# Altium PCB cSLIM-shield.PcbDoc (part 1 of 2)
Units mm, origin at the board's own origin, x right, y up, seen from the top; angles counter-clockwise.
Board outline 102.87 x 55.88 mm, 2 copper layers (F.Cu, B.Cu); 128 components, 156 nets, 529 pads, 123 vias.
Unrouted connection lines stored in the file: 8.
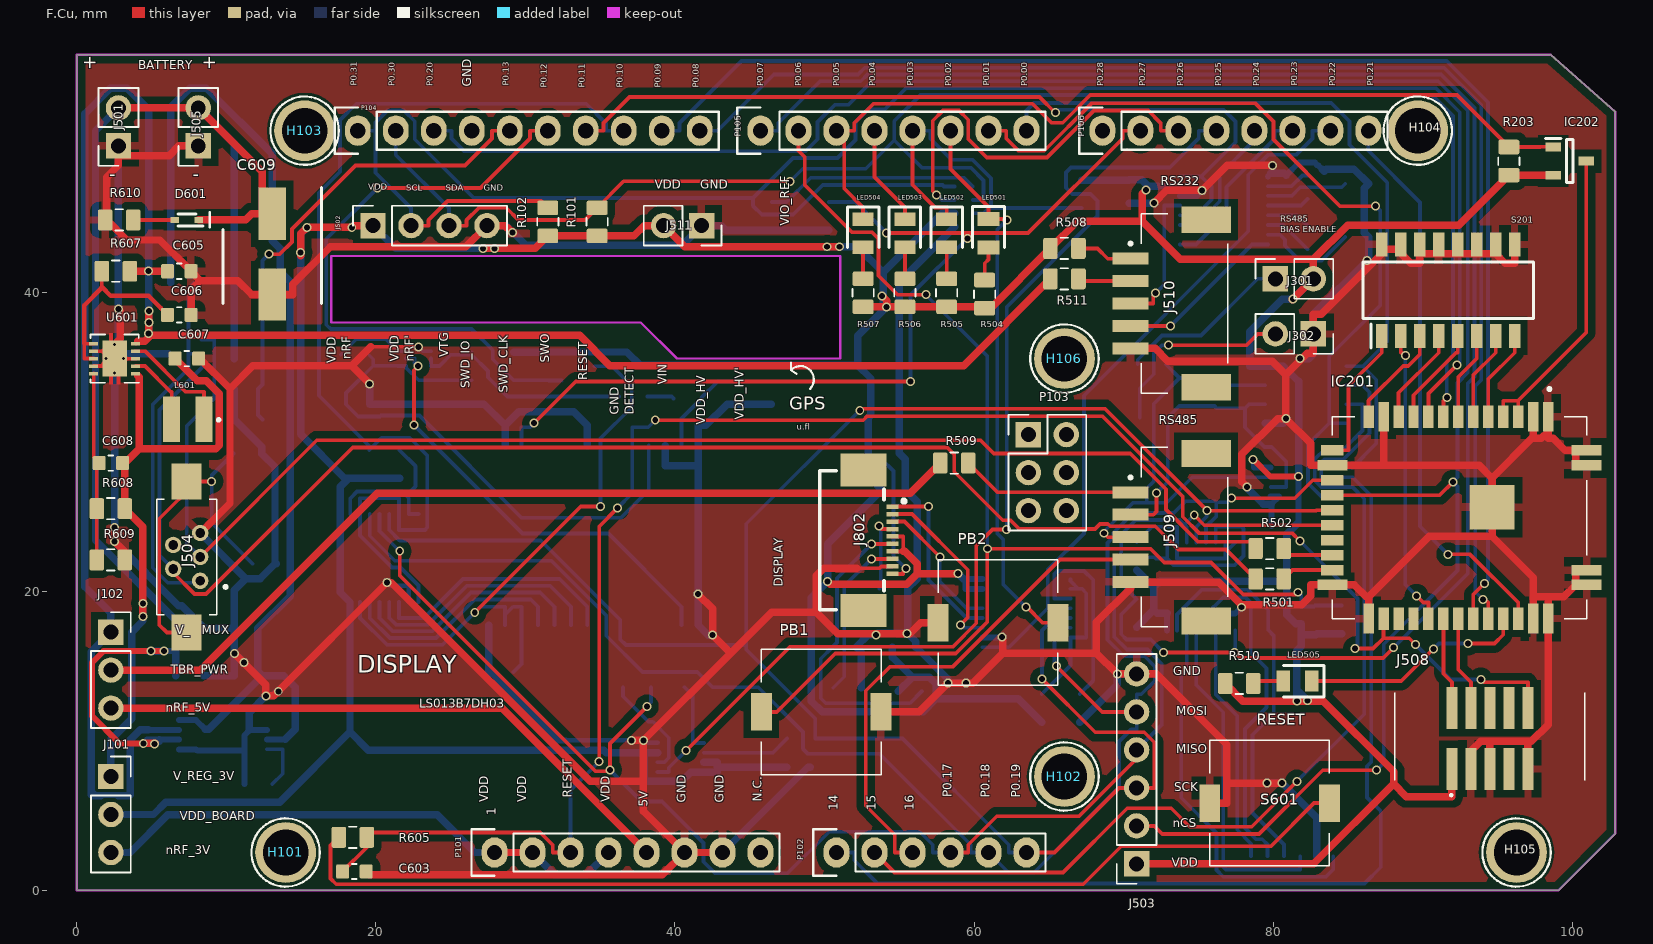
[diagram p0: F.Cu view]
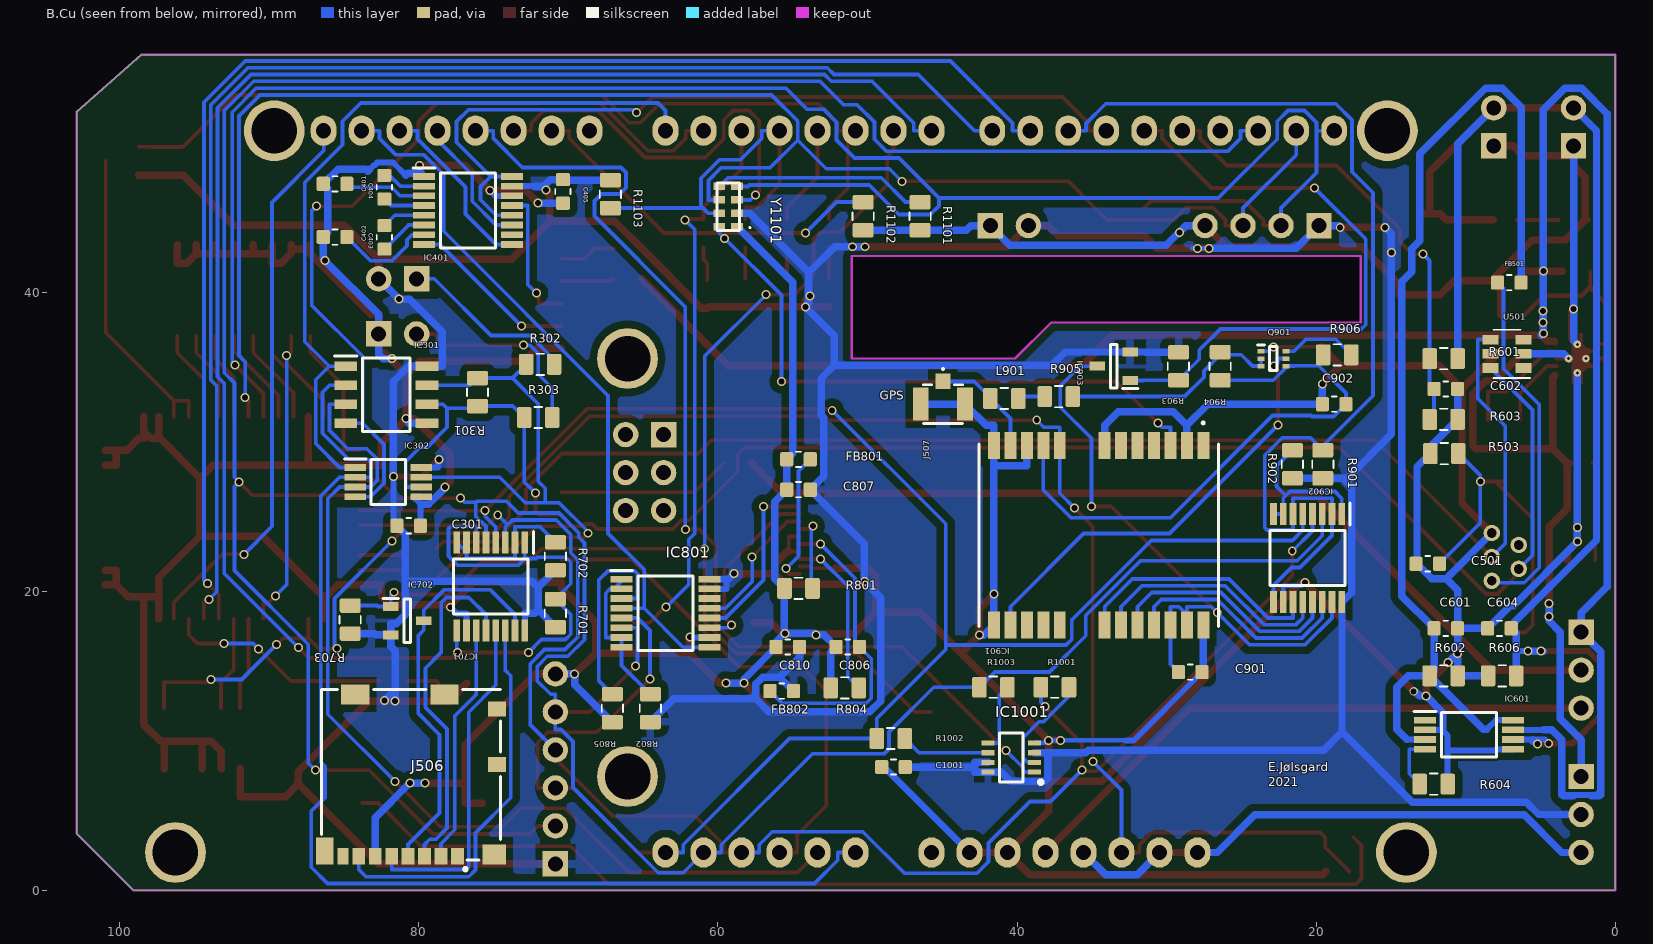
[diagram p1: B.Cu view, seen from below]

## Layer stack, top to bottom
F.Mask: solder mask 0.0102, Solder Resist, Dk 3.5
F.Cu: signal copper 0.0356
Dielectric 1: dielectric 0.32, FR-4, Dk 4.8
B.Cu: signal copper 0.0356
B.Mask: solder mask 0.0102, Solder Resist, Dk 3.5

## Board outline
64.516,55.88 98.552,55.88 102.87,52.07 102.87,40.64 102.87,3.81 99.06,0 66.04,0 0,0 0,55.88 64.516,55.88
cut-out: 51.054,42.418 51.054,38.862 51.054,35.56 43.053,35.56 40.132,35.56 37.719,37.973 35.941,37.973 17.018,37.973 17.018,38.227 17.018,38.862 17.018,42.418 51.054,42.418

## Design rules (kind name [scope] priority, off if disabled: settings)
Clearance "Clearence 0,504_Polygon" [InNamedPolygon('F.Cu-GND') OR InNamedPolygon('B.Cu-VDD')] p1: gap=0.504 ignorepadtopadclearanceinfootprint=FALSE
Clearance "Clearence 0,2_NetClass" [InNetClass('Default') OR InNetClass('GND') OR InNetClass('PWR')] p2: gap=0.2 ignorepadtopadclearanceinfootprint=FALSE
HoleSize "Hole Size (Default)" [All] p1: absolutevalues=TRUE maxlimit=10 minlimit=0.3 maxpercent=80.000 minpercent=20.000
MinimumSolderMaskSliver [All] p1: minsoldermaskwidth=0
PolygonConnect Polygon_B.Cu-VDD_ConnectDirect [IsNamedPolygon('B.Cu-VDD') vs IsVia] p1: connectstyle=Direct reliefconductorwidth=0.254 reliefentries=4 polygonreliefangle="90 Angle" airgapwidth=0.254
PolygonConnect Polygon_B.Cu-VDD_ConnectRelief45 [IsNamedPolygon('B.Cu-VDD') vs (IsThruPin or IsSMTPin) and (PadShape_AllLayers = 'Round')] p2: connectstyle=Relief reliefconductorwidth=0.508 reliefentries=4 polygonreliefangle="45 Angle" airgapwidth=0.508
PolygonConnect Polygon_B.Cu-VDD_ConnectRelief90 [IsNamedPolygon('B.Cu-VDD') vs (IsThruPin or IsSMTPin) and (PadShape_AllLayers <> 'Round')] p3: connectstyle=Relief reliefconductorwidth=0.508 reliefentries=4 polygonreliefangle="90 Angle" airgapwidth=0.508
PolygonConnect Polygon_F.Cu-GND_ConnectDirect [IsNamedPolygon('F.Cu-GND') vs IsVia] p4: connectstyle=Direct reliefconductorwidth=0.254 reliefentries=4 polygonreliefangle="90 Angle" airgapwidth=0.254
PolygonConnect Polygon_F.Cu-GND_ConnectRelief45 [IsNamedPolygon('F.Cu-GND') vs (IsThruPin or IsSMTPin) and (PadShape_AllLayers = 'Round')] p5: connectstyle=Relief reliefconductorwidth=0.508 reliefentries=4 polygonreliefangle="45 Angle" airgapwidth=0.508
PolygonConnect Polygon_F.Cu-GND_ConnectRelief90 [IsNamedPolygon('F.Cu-GND') vs (IsThruPin or IsSMTPin) and (PadShape_AllLayers <> 'Round')] p6: connectstyle=Relief reliefconductorwidth=0.508 reliefentries=4 polygonreliefangle="90 Angle" airgapwidth=0.508
RoutingVias [All] p1: holewidth=0.711 width=1.27 viastyle="Through Hole" minholewidth=0.711 minwidth=1.27 maxholewidth=0.711 maxwidth=1.27
SilkToSilkClearance [All] p1: silktosilkclearance=0
SilkToSolderMaskClearance [IsPad] p1: minsilkscreentomaskgap=0 clearancetoexposedcopper=TRUE
SolderMaskExpansion [All] p1: expansion=0.102 istentingtop=FALSE
Width [All] p1: maxlimit=10 minlimit=0.2 preferedwidth=0.25 minimp=50.000000 maximp=50.000000 favimp=50.000000
26 further rules are at their usual default settings.

## Classes and differential pairs
net class PWR: +BATT TBR_PWR USB_VBUS V_MUX_OUT V_nRF_3V V_nRF_5V V_reg VDD
net class GND: GND
net class Default: AD1 AD2 AD3 AD4 AD5 AD6 AD7 AD8 ANT_ON C1+ C1- C2+ C2- GPS_ANTENNA GPS_EXTINT GPS_MISO GPS_MOSI GPS_nCS GPS_SCK GPS_TIMEPULSE GPS_VDD I2C_SCL I2C_SDA LoRa_nRESET LoRa_SWDCLK LoRa_SWDIO LoRa_SWO LoRa_USB_DM LoRa_USB_DP MOSI nCS Net-(C501-Pad1) Net-(C606-Pad1) Net-(C608-Pad2) Net-(C806-Pad1) Net-(C902-Pad1) Net-(D601-Pad2) Net-(FB501-Pad2) Net-(FB801-Pad1) Net-(H101-Pad1) Net-(H102-Pad1) Net-(H103-Pad1) Net-(H104-Pad1) Net-(H105-Pad1) Net-(H106-Pad1) Net-(IC201-Pad3) Net-(IC201-Pad20) Net-(IC201-Pad26) Net-(IC201-Pad27) Net-(IC401-Pad10) Net-(IC601-Pad1) Net-(IC601-Pad4) Net-(IC701-Pad2) Net-(IC801-Pad1) Net-(IC801-Pad3) Net-(IC801-Pad14) Net-(IC901-Pad1) Net-(IC901-Pad5) Net-(IC901-Pad6) Net-(IC901-Pad15) Net-(IC901-Pad16) Net-(IC901-Pad17) Net-(IC902-Pad1) Net-(IC1001-Pad2) Net-(IC1001-Pad5) Net-(IC1001-Pad6) Net-(J301-Pad1) Net-(J302-Pad2) Net-(J504-Pad4) Net-(J506-Pad1) Net-(J506-Pad8) Net-(J508-Pad7) Net-(J508-Pad8) Net-(J509-Pad1) Net-(J509-PadMP1) Net-(J509-PadMP2) Net-(J510-Pad1) Net-(J510-Pad2) Net-(J510-PadMP1) Net-(J510-PadMP2) Net-(J802-Pad4) Net-(J802-Pad8) Net-(L601-Pad1) Net-(L601-Pad2) Net-(L901-Pad2) Net-(LED501-Pad2) Net-(LED502-Pad2) Net-(LED503-Pad2) Net-(LED504-Pad2) Net-(LED505-Pad2) Net-(P101-Pad8) Net-(P103-Pad1) Net-(P103-Pad2) Net-(P103-Pad3) Net-(P103-Pad4) Net-(P103-Pad5) Net-(P103-Pad6) Net-(P104-Pad4) Net-(P106-Pad1) Net-(Q901-Pad2) Net-(Q901-Pad6) Net-(R605-Pad2) Net-(R1101-Pad1) Net-(U501-Pad1) Net-(U501-Pad3) P0.00 P0.01 P0.02 P0.03 P0.04 P0.05 P0.06 P0.07 P0.08 P0.09 P0.10 P0.11 P0.12 P0.13 P0.14 P0.15 P0.16 P0.17 P0.18 P0.19 P0.20 P0.21 P0.22 P0.23 P0.24 P0.25 P0.26 PB03 RS232_RX RS232_TX RS485_A RS485_B SCK USB_N USB_P uSD_CLK uSD_MISO uSD_MOSI uSD_nCS uSD_VDD V+ V-

## Components (designator, comment, footprint, x,y, rotation, side; value= is the part's Value field where it differs from the comment)
C301 "100nF" C_0603_1608Metric#1 80.671,24.384 r0 bottom
C401 "100nF" C_0603_1608Metric#1 85.598,47.244 r180 bottom
C402 "100nF" C_0603_1608Metric#1 85.598,43.688 r180 bottom
C403 "100nF" C_0603_1608Metric#1 82.296,43.663 r90 bottom
C404 "100nF" C_0603_1608Metric#1 82.296,47.015 r90 bottom
C405 "100nF" C_0603_1608Metric#1 70.358,46.736 r90 bottom
C501 "12pF" C_0603_1608Metric#1 12.548,21.844 r180 bottom
C601 "100nF" C_0603_1608Metric#1 11.329,17.526 r0 bottom
C602 "1uF" C_0603_1608Metric#1 11.329,33.528 r0 bottom
C603 "1uF" C_0603_1608Metric#2 18.568,1.27 r0 top
C604 "100nF" C_0603_1608Metric#1 7.747,17.526 r180 bottom
C605 "10uF" C_0603_1608Metric#2 6.858,41.402 r0 top
C606 "100nF" C_0603_1608Metric#2 6.858,38.481 r0 top
C607 "22uF" C_0603_1608Metric#2 7.366,35.56 r0 top
C608 "1.8pF" C_0603_1608Metric#2 2.286,28.575 r180 top
C609 "PCH1E101MCL4GS" CAPAE660X840N 13.081,42.545 r270 top
C806 "100nF" C_0603_1608Metric#1 51.316,16.278 r180 bottom
C807 "1uF/50V" C_0603_1608Metric#1 54.61,26.797 r180 bottom
C810 "100nF" C_0603_1608Metric#1 55.326,16.278 r180 bottom
C901 "100nF" C_0603_1608Metric#1 28.422,14.605 r0 bottom
C902 "1uF" C_0603_1608Metric#1 18.796,32.512 r180 bottom
C1001 "100nF" C_0603_1608Metric#1 48.26,8.255 r180 bottom
D601 "1SS390SMFHT2R" SODFL1608X70N 7.366,44.831 r180 top
FB501 "500mA" C_0603_1608Metric#1 7.087,40.64 r180 bottom
FB801 "Ferrite_Bead" C_0603_1608Metric#1 54.61,28.829 r180 bottom
FB802 "Ferrite_Bead" C_0603_1608Metric#1 55.726,13.328 r180 bottom
H101 "CONN_01X01" Arduino_1pin 13.97,2.54 r0 top
H102 "CONN_01X01" Arduino_1pin 66.04,7.62 r0 top
H103 "CONN_01X01" Arduino_1pin 15.24,50.8 r0 top
H104 "CONN_01X01" Arduino_1pin 89.662,50.8 r0 top
H105 "CONN_01X01" Arduino_1pin 96.266,2.54 r0 top
H106 "CONN_01X01" Arduino_1pin 66.04,35.56 r0 top
IC201 "WLR089U0-I_RM" WLR089U0IRM 92.456,25.4 r270 top
IC202 "NX2301P,215" SOT95P230X110-3N#1 99.822,48.768 r0 top
IC301 "MAX3486ESA+" SOIC127P600X175-8N 82.169,33.147 r0 bottom
IC302 "MAX3471EUA+" SOP65P490X110-8N 82.042,27.305 r0 bottom
IC401 "MAX3221CUE+" SOP65P640X110-16N 76.708,45.466 r0 bottom
IC601 "TPS2113PWR" SOP65P640X120-8N 9.779,10.414 r0 bottom
IC701 "SN74AVC4T774PWR" SOP65P640X120-16N 75.184,20.32 r90 bottom
IC702 "NX2301P,215" SOT95P230X110-3N#2 80.772,18.034 r0 bottom
IC801 "SN74AVC4T774PWR" SOP65P640X120-16N 63.5,18.542 r0 bottom
IC901 "NEO-M9N-00B" NEO-M8T 34.544,23.749 r270 bottom
IC902 "SN74AVC4T774PWR" SOP65P640X120-16N 20.574,22.225 r90 bottom
IC903 "NX2301P,215" SOT95P230X110-3N#2 33.528,35.052 r180 bottom
IC1001 "CY15B108QN-20LPXC" SON65P323X328X55-8N 40.386,8.89 r180 bottom
J101 "Conn_01x03_Male" PinSocket_1x03_P2.54mm_Vertical 2.286,7.62 r0 top
J102 "Conn_01x03_Male" PinSocket_1x03_P2.54mm_Vertical 2.286,17.272 r0 top
J301 "Conn_01x02_Male" PinSocket_1x02_P2.54mm_Vertical 80.137,40.894 r90 top
J302 "Conn_01x02_Male" PinSocket_1x02_P2.54mm_Vertical 82.677,37.211 r270 top
J501 "Conn_01x02_Male" PinSocket_1x02_P2.54mm_Vertical 2.794,49.784 r180 top
J502 "Conn_01x04" PinSocket_1x04_P2.54mm_Vertical 19.812,44.45 r90 top
J503 "Conn_01x06" PinSocket_1x06_P2.54mm_Vertical 70.866,1.778 r180 top
J504 "10119313-302TLF" 10119313302TLF 8.255,20.701 r90 top
J505 "Conn_01x02_Male" PinSocket_1x02_P2.54mm_Vertical 8.128,49.784 r180 top
J506 "104031-0811" 1040310811 80.518,2.032 r0 bottom
J507 "CONUFL001-SMD-T" CONUFL001-SMD 44.958,32.512 r180 bottom
J508 "SHF-105-01-L-D-SM" SHF-105-01-X-D-SM 94.488,10.16 r0 top
J509 "BM05B-ZESS-TBT__LF__SN_" BM05BZESSTBTLFSN 73.66,23.622 r90 top
J510 "BM05B-ZESS-TBT__LF__SN_" BM05BZESSTBTLFSN 73.66,39.243 r90 top
J511 "Conn_01x02_Male" PinSocket_1x02_P2.54mm_Vertical 41.783,44.45 r270 top
J802 "52746-1071" 52746-1071 53.975,28.067 r270 top
L601 "LPS3015-222MRB" LPS3015 7.43,31.496 r180 top
L901 "L" L_0805_2012Metric 40.846,32.893 r0 bottom
LED501 "APT2012LSECK_J3-PRV" LEDC2012X75N 60.96,43.942 r270 top
LED502 "APT2012LSYCK_J3-PRV" LEDC2012X85N 58.166,43.942 r270 top
LED503 "APT2012LZGCK" LEDC2012X85N 55.372,43.942 r270 top
LED504 "APT2012LVBC_D" LEDC2012X85N 52.578,43.942 r270 top
LED505 "APT2012LVBC_D" LEDC2012X85N 81.629,14 r180 top
P101 "Power" Socket_Strip_Arduino_1x08 27.94,2.54 r0 top
P102 "Analog" Socket_Strip_Arduino_1x06 50.8,2.54 r0 top
P103 "Conn_02x03_Odd_Even" PinHeader_2x03_P2.54mm_Vertical 63.627,30.48 r0 top
P104 "Digital" Socket_Strip_Arduino_1x10 18.796,50.8 r0 top
P105 "Digital" Socket_Strip_Arduino_1x08 45.72,50.8 r0 top
P106 "Digital" Socket_Strip_Arduino_1x08 68.58,50.8 r0 top
PB1 "TLS_A_070J_LFS" TLSA070JLFS 49.784,11.938 r0 top
PB2 "TLS_A_070J_LFS" TLSA070JLFS 61.595,17.907 r180 top
Q901 "SI1040X-T1-GE3" SOTFL50P160X60-6N 22.86,35.56 r0 bottom
R101 "4.7k" R_0805_2012Metric#1 34.798,44.704 r270 top
R102 "4.7k" R_0805_2012Metric#1 31.496,44.704 r270 top
R203 "100k" R_0805_2012Metric#1 95.758,48.768 r270 top
R301 "120R" R_0805_2012Metric#2 76.073,33.322 r90 bottom
R302 "680R" R_0805_2012Metric#2 71.882,35.179 r180 bottom
R303 "680R" R_0805_2012Metric#2 72.009,31.623 r0 bottom
R501 "15R" R_0805_2012Metric#1 79.756,20.828 r0 top
R502 "15R" R_0805_2012Metric#1 79.756,22.86 r0 top
R503 "0R" R_0805_2012Metric#2 11.43,29.21 r180 bottom
R504 "820R" R_0805_2012Metric#1 60.706,39.878 r270 top
R505 "820R" R_0805_2012Metric#1 58.166,39.957 r270 top
R506 "330R" R_0805_2012Metric#1 55.372,39.957 r270 top
R507 "330R" R_0805_2012Metric#1 52.578,39.957 r270 top
R508 "0R" R_0805_2012Metric#1 66.04,42.926 r180 top
R509 "0R" R_0805_2012Metric#1 58.674,28.575 r180 top
R510 "330R" R_0805_2012Metric#1 77.724,13.843 r180 top
R511 "0R" R_0805_2012Metric#1 66.04,40.894 r180 top
R601 "240k" R_0805_2012Metric#2 11.479,35.56 r0 bottom
R602 "1M" R_0805_2012Metric#2 11.479,14.351 r0 bottom
R603 "100k" R_0805_2012Metric#2 11.479,31.496 r0 bottom
R604 "390R" R_0805_2012Metric#2 12.143,7.112 r0 bottom
R605 "1k" R_0805_2012Metric#1 18.464,3.556 r180 top
R606 "1M" R_0805_2012Metric#2 7.571,14.351 r180 bottom
R607 "100R" R_0805_2012Metric#1 2.618,41.402 r0 top
R608 "1M2" R_0805_2012Metric#1 2.286,25.527 r180 top
R609 "240k" R_0805_2012Metric#1 2.286,22.098 r0 top
R610 "3k" R_0805_2012Metric#1 2.842,44.831 r180 top
R701 "100k" R_0805_2012Metric#2 70.866,18.542 r90 bottom
R702 "100k" R_0805_2012Metric#2 70.866,22.352 r90 bottom
R703 "100k" R_0805_2012Metric#2 84.582,18.113 r90 bottom
R801 "100k" R_0805_2012Metric#2 54.61,20.193 r180 bottom
R802 "100k" R_0805_2012Metric#2 64.516,12.192 r90 bottom
R804 "100k" R_0805_2012Metric#2 51.516,13.548 r180 bottom
R805 "100k" R_0805_2012Metric#2 67.056,12.192 r90 bottom
R901 "100k" R_0805_2012Metric#2 19.558,28.496 r90 bottom
R902 "100k" R_0805_2012Metric#2 21.59,28.496 r90 bottom
R903 "100k" R_0805_2012Metric#2 29.21,35.052 r270 bottom
R904 "0R" R_0805_2012Metric#2 26.416,35.052 r90 bottom
R905 "10R" R_0805_2012Metric#2 37.211,33.02 r180 bottom
R906 "100k" R_0805_2012Metric#2 18.591,35.814 r180 bottom
R1001 "33R" R_0805_2012Metric#2 37.465,13.589 r0 bottom
R1002 "33R" R_0805_2012Metric#2 48.436,10.16 r0 bottom
R1003 "50R" R_0805_2012Metric#2 41.578,13.589 r0 bottom
R1101 "10k" R_0805_2012Metric#2 46.482,45.085 r90 bottom
R1102 "100k" R_0805_2012Metric#2 50.292,45.085 r270 bottom
R1103 "100k" R_0805_2012Metric#2 67.183,46.561 r270 bottom
S201 "97C08ST" SOIC127P671X170-16N 91.694,40.132 r90 top
S601 "TLS_A_070J_LFS" TLSA070JLFS 79.756,5.842 r180 top
U501 "USBLC6-2SC6" SOT-23-6 7.239,35.88 r180 bottom
U601 "TPS63000" Texas_DRC0010J_ThermalVias 2.54,35.56 r180 top
Y1101 "RV-3032-C7-TA-QC" RV3032C7TAQA 59.309,45.72 r90 bottom

## Footprints (in the part's own frame and the unit in brackets; to place one, negate y for a bottom-side part, rotate by r counter-clockwise, add the part's x,y. Pads: shape width x height; smd on the part's side, far side on the other; paste and mask are expansions set on the pad)
52746-1071 [mm]
  rect 0.3x0.8 smd mask+0: 1(2.4,0.556) 2(2.9,0.556) 3(3.4,0.556) 4(3.9,0.556) 5(4.4,0.556) 6(4.9,0.556) 7(5.4,0.556) 8(5.9,0.556) 9(6.4,0.556) 10(6.9,0.556)
  rect 2.2x3.05 smd mask+0: 11(-0.05,-1.369) 12(9.35,-1.369)
  silkscreen extent 0,-4.3 9.3,1.44
1040310811 [mm]
  rect 0.85x1.1 smd mask+0: 1(-3.105,-0.25) 2(-2.005,-0.25) 3(-0.905,-0.25) 4(0.195,-0.25) 5(1.295,-0.25) 6(2.395,-0.25) 7(3.495,-0.25)
  rect 0.75x1.1 smd mask+0: 8(4.545,-0.25)
  rect 1.17x1.8 smd mask+0: 9(5.755,-0.6)
  rect 1.9x1.35 smd mask+0: 10(3.73,-11.075) 11(-2.24,-11.075)
  rect 1.2x1 smd mask+0: 12(-5.74,-10.1) 13(-5.74,-6.4)
  rect 1.55x1.35 smd mask+0: 14(-5.565,-0.375)
  silkscreen extent -5.97,-11.4 5.97,0.72
10119313302TLF [mm]
  round 1.1 hole 0.65 paste-1.1 mask+0: 1(0,0) 2(0.8,1.8) 3(1.6,0) 4(2.4,1.8) 5(3.2,0)
  rect 2.4x2 smd mask+0: MP1(-3.45,0.9) MP2(6.65,0.9)
  silkscreen extent -2.25,-1.8 5.45,2.9
Arduino_1pin [mil]
  round 160 hole 120 paste-160 mask+0: 1(0,0)
  silkscreen extent -90,-90 90,90
BM05BZESSTBTLFSN [mm]
  rect 0.8x2.4 smd mask+0: 1(3,3.2) 2(1.5,3.2) 3(0,3.2) 4(-1.5,3.2) 5(-3,3.2)
  rect 1.8x3.3 smd mask+0: MP1(5.6,-1.85) MP2(-5.6,-1.85)
  silkscreen extent -6,-3.3 6,3.3
C_0603_1608Metric#1 [mm]
  rrect25% 0.875x0.95 smd mask+0: 1(0.787,0) 2(-0.787,0)
  silkscreen extent -0.16,-0.51 0.16,0.51
C_0603_1608Metric#2 [mm]
  rrect25% 0.875x0.95 smd mask+0: 1(-0.787,0) 2(0.787,0)
  silkscreen extent -0.16,-0.51 0.16,0.51
CAPAE660X840N [mm]
  rect 3.5x1.85 smd mask+0: 1(-2.7,0) 2(2.7,0)
  silkscreen extent -4.45,-3.3 3.3,3.3
CONUFL001-SMD [mm]
  rect 1x1.05 smd mask+0: 1(0,1.525)
  rect 1.05x2.2 smd mask+0: 2(1.475,0) 3(-1.475,0)
  silkscreen extent -1.3,-1.3 1.3,2.38
L_0805_2012Metric [mm]
  rrect25% 0.975x1.4 smd mask+0: 1(0.937,0) 2(-0.937,0)
  silkscreen extent -0.26,-0.71 0.26,0.71
LEDC2012X75N [mm]
  rect 0.95x1.45 smd mask+0: 1(-0.95,0) 2(0.95,0)
  silkscreen extent -1.78,-1.07 0.95,1.07
LEDC2012X85N [mm]
  rect 0.9x1.4 smd mask+0: 1(-0.95,0) 2(0.95,0)
  silkscreen extent -1.75,-1.05 0.95,1.05
LPS3015 [mm]
  rect 1.14x3.05 smd mask+0: 1(-1.08,0) 2(1.08,0)
  silkscreen extent -2.11,-0.03 -2,0.09
NEO-M8T [mm]
  rect 1.8x0.8 smd mask+0: 1(-6,7) 2(-6,5.9) 3(-6,4.8) 4(-6,3.7) 5(-6,2.6) 6(-6,1.5) 7(-6,0.4) 8(-6,-2.6) 9(-6,-3.7) 10(-6,-4.8) 11(-6,-5.9) 12(-6,-7) 13(6,-7) 14(6,-5.9) 15(6,-4.8) 16(6,-3.7) 17(6,-2.6) 18(6,0.4) 19(6,1.5) 20(6,2.6) 21(6,3.7) 22(6,4.8) 23(6,5.9) 24(6,7)
  silkscreen extent -7.58,-8 6.1,8
PinHeader_2x03_P2.54mm_Vertical [mm]
  rect 1.7x1.7 hole 1 paste-1.7 mask+0: 1(0,0)
  rrect100% 1.7x1.7 hole 1 paste-1.7 mask+0: 2(2.54,0) 3(0,-2.54) 4(2.54,-2.54) 5(0,-5.08) 6(2.54,-5.08)
  silkscreen extent -1.33,-6.41 3.87,1.33
PinSocket_1x02_P2.54mm_Vertical [mm]
  rect 1.7x1.7 hole 1 paste-1.7 mask+0: 1(0,0)
  rrect100% 1.7x1.7 hole 1 paste-1.7 mask+0: 2(0,-2.54)
  silkscreen extent -1.33,-3.87 1.33,1.33
PinSocket_1x03_P2.54mm_Vertical [mm]
  rect 1.7x1.7 hole 1 paste-1.7 mask+0: 1(0,0)
  rrect100% 1.7x1.7 hole 1 paste-1.7 mask+0: 2(0,-2.54) 3(0,-5.08)
  silkscreen extent -1.33,-6.41 1.33,1.33
PinSocket_1x04_P2.54mm_Vertical [mm]
  rect 1.7x1.7 hole 1 paste-1.7 mask+0: 1(0,0)
  rrect100% 1.7x1.7 hole 1 paste-1.7 mask+0: 2(0,-2.54) 3(0,-5.08) 4(0,-7.62)
  silkscreen extent -1.33,-8.95 1.33,1.33
PinSocket_1x06_P2.54mm_Vertical [mm]
  rect 1.7x1.7 hole 1 paste-1.7 mask+0: 1(0,0)
  rrect100% 1.7x1.7 hole 1 paste-1.7 mask+0: 2(0,-2.54) 3(0,-5.08) 4(0,-7.62) 5(0,-10.16) 6(0,-12.7)
  silkscreen extent -1.33,-14.03 1.33,1.33
R_0805_2012Metric#1 [mm]
  rrect25% 0.975x1.4 smd mask+0: 1(-0.937,0) 2(0.937,0)
  silkscreen extent -0.26,-0.71 0.26,0.71
R_0805_2012Metric#2 [mm]
  rrect25% 0.975x1.4 smd mask+0: 1(0.937,0) 2(-0.937,0)
  silkscreen extent -0.26,-0.71 0.26,0.71
RV3032C7TAQA [mm]
  rect 0.5x0.8 smd: 1(-1.35,-0.6) 2(-0.45,-0.6) 3(0.45,-0.6) 4(1.35,-0.6) 5(1.35,0.6) 6(0.45,0.6) 7(-0.45,0.6) 8(-1.35,0.6)
  silkscreen extent -1.61,-1.5 1.59,0.75, body extent -1.6,-0.75 1.6,0.75, height 0.8
SHF-105-01-X-D-SM [mm]
  rect 0.74x2.795 smd mask+0: 1(-2.54,-2.033) 2(-2.54,2.033) 3(-1.27,-2.033) 4(-1.27,2.033) 5(0,-2.033) 6(0,2.033) 7(1.27,-2.033) 8(1.27,2.033) 9(2.54,-2.033) 10(2.54,2.033)
  silkscreen extent -6.35,-3.83 6.35,3.05
Socket_Strip_Arduino_1x06 [mil]
  rrect100% 68x80 hole 40 paste-80 mask+0: 1(0,0) 2(100,0) 3(200,0) 4(300,0) 5(400,0) 6(500,0)
  silkscreen extent -61,-61 550,61
Socket_Strip_Arduino_1x08 [mil]
  rrect100% 68x80 hole 40 paste-80 mask+0: 1(0,0) 2(100,0) 3(200,0) 4(300,0) 5(400,0) 6(500,0) 7(600,0) 8(700,0)
  silkscreen extent -61,-61 750,61
Socket_Strip_Arduino_1x10 [mil]
  rrect100% 68x80 hole 40 paste-80 mask+0: 1(0,0) 2(100,0) 3(200,0) 4(300,0) 5(400,0) 6(500,0) 7(600,0) 8(700,0) 9(800,0) 10(900,0)
  silkscreen extent -61,-61 950,61
SODFL1608X70N [mm]
  rect 0.56x0.42 smd mask+0: 1(-0.8,0) 2(0.8,0)
  silkscreen extent -1.08,-0.4 0.6,0.4
SOIC127P600X175-8N [mm]
  rect 1.525x0.65 smd mask+0: 1(2.712,-1.905) 2(2.712,-0.635) 3(2.712,0.635) 4(2.712,1.905) 5(-2.712,1.905) 6(-2.712,0.635) 7(-2.712,-0.635) 8(-2.712,-1.905)
  silkscreen extent -1.6,-2.58 3.47,2.45
SOIC127P671X170-16N [mm]
  rect 1.6x0.75 smd mask+0: 1(-3.05,4.445) 2(-3.05,3.175) 3(-3.05,1.905) 4(-3.05,0.635) 5(-3.05,-0.635) 6(-3.05,-1.905) 7(-3.05,-3.175) 8(-3.05,-4.445) 9(3.05,-4.445) 10(3.05,-3.175) 11(3.05,-1.905) 12(3.05,-0.635) 13(3.05,0.635) 14(3.05,1.905) 15(3.05,3.175) 16(3.05,4.445)
  silkscreen extent -3.85,-5.69 1.9,5.69
SON65P323X328X55-8N [mm]
  rect 0.85x0.35 smd mask+0: 1(1.55,-0.975) 2(1.55,-0.325) 3(1.55,0.325) 4(1.55,0.975) 5(-1.55,0.975) 6(-1.55,0.325) 7(-1.55,-0.325) 8(-1.55,-0.975)
  silkscreen extent -0.77,-1.77 2.1,1.64
SOP65P490X110-8N [mm]
  rect 1.425x0.45 smd mask+0: 1(2.212,-0.975) 2(2.212,-0.325) 3(2.212,0.325) 4(2.212,0.975) 5(-2.212,0.975) 6(-2.212,0.325) 7(-2.212,-0.325) 8(-2.212,-0.975)
  silkscreen extent -1.15,-1.55 2.93,1.5
SOP65P640X110-16N [mm]
  rect 1.475x0.45 smd mask+0: 1(2.938,-2.275) 2(2.938,-1.625) 3(2.938,-0.975) 4(2.938,-0.325) 5(2.938,0.325) 6(2.938,0.975) 7(2.938,1.625) 8(2.938,2.275) 9(-2.938,2.275) 10(-2.938,1.625) 11(-2.938,0.975) 12(-2.938,0.325) 13(-2.938,-0.325) 14(-2.938,-0.975) 15(-2.938,-1.625) 16(-2.938,-2.275)
  silkscreen extent -1.85,-2.85 3.67,2.5
SOP65P640X120-8N [mm]
  rect 1.475x0.45 smd mask+0: 1(2.938,-0.975) 2(2.938,-0.325) 3(2.938,0.325) 4(2.938,0.975) 5(-2.938,0.975) 6(-2.938,0.325) 7(-2.938,-0.325) 8(-2.938,-0.975)
  silkscreen extent -1.85,-1.55 3.67,1.5
SOP65P640X120-16N [mm]
  rect 1.475x0.45 smd mask+0: 1(2.938,-2.275) 2(2.938,-1.625) 3(2.938,-0.975) 4(2.938,-0.325) 5(2.938,0.325) 6(2.938,0.975) 7(2.938,1.625) 8(2.938,2.275) 9(-2.938,2.275) 10(-2.938,1.625) 11(-2.938,0.975) 12(-2.938,0.325) 13(-2.938,-0.325) 14(-2.938,-0.975) 15(-2.938,-1.625) 16(-2.938,-2.275)
  silkscreen extent -1.85,-2.85 3.67,2.5
SOT95P230X110-3N#1 [mm]
  rect 1.05x0.6 smd mask+0: 1(-1.1,0.95) 2(-1.1,-0.95) 3(1.1,0)
  silkscreen extent -1.63,-1.45 0.23,1.5
SOT95P230X110-3N#2 [mm]
  rect 1.05x0.6 smd mask+0: 1(1.1,-0.95) 2(1.1,0.95) 3(-1.1,0)
  silkscreen extent -0.23,-1.5 1.63,1.45
SOT-23-6 [mm]
  rect 1.06x0.65 smd mask+0: 1(1.1,-0.95) 2(1.1,0) 3(1.1,0.95) 4(-1.1,0.95) 5(-1.1,0) 6(-1.1,-0.95)
  silkscreen extent -0.9,-1.61 1.55,1.61
SOTFL50P160X60-6N [mm]
  rect 0.47x0.3 smd mask+0: 1(0.835,-0.5) 2(0.835,0) 3(0.835,0.5) 4(-0.835,0.5) 5(-0.835,0) 6(-0.835,-0.5)
  silkscreen extent -0.25,-0.9 1.07,0.8
Texas_DRC0010J_ThermalVias [mm]
  rect 0.6x0.24 smd mask+0: 1(-1.4,1) 2(-1.4,0.5) 3(-1.4,0) 4(-1.4,-0.5) 5(-1.4,-1) 6(1.4,-1) 7(1.4,-0.5) 8(1.4,0) 9(1.4,0.5) 10(1.4,1)
  round 0.5 hole 0.2 paste-0.5 mask-0.5: 11(-0.575,0) 11(0,0.95) 11(0,-0.95) 11(0.575,0)
  rect 1.65x2.4 smd paste-2.4 mask+0: 11(0,0)
  rrect10% 1.5x1.06 on Top Paste mask-1.5: Un1(0,-0.63) Un2(0,0.63)
  rrect10% 0.25x0.34 on Top Paste mask-0.34: Un3(-0.25,1.53) Un4(0.25,1.53) Un5(-0.25,-1.53) Un6(0.25,-1.53)
  F.Cu region: 0.375,-1.7 0.125,-1.7 0.125,-1.1 -0.125,-1.1 -0.125,-1.7 -0.375,-1.7 -0.375,1.1 -0.375,1.7 -0.125,1.7 -0.125,1.1 0.125,1.1 0.125,1.7 0.375,1.7
  silkscreen extent -1.64,-1.61 1.61,1.61
TLSA070JLFS [mm]
  rect 1.4x2.5 smd mask+0: 1(-4,0) 2(4,0)
  silkscreen extent -4,-4.2 4,4.2
WLR089U0IRM [mm]
  rect 2x0.7 smd mask+0: 1(-6.275,5.92) 2(-6.275,4.92) 12(-6.275,-5.08) 24(7.225,-6.08) 35(7.225,4.92) 36(7.225,5.92)
  rect 1.5x0.7 smd mask+0: 3(-6.275,3.92) 4(-6.275,2.92) 5(-6.275,1.92) 6(-6.275,0.92) 7(-6.275,-0.08) 8(-6.275,-1.08) 9(-6.275,-2.08) 10(-6.275,-3.08) 11(-6.275,-4.08) 13(-6.275,-6.08) 25(7.225,-5.08) 26(7.225,-4.08) 27(7.225,-3.08) 28(7.225,-2.08) 29(7.225,-1.08) 30(7.225,-0.08) 31(7.225,0.92) 32(7.225,1.92) 33(7.225,2.92) 34(7.225,3.92)
  rect 0.7x1.5 smd mask+0: 14(-4.025,-8.5) 16(-2.025,-8.5) 17(-1.025,-8.5) 18(-0.025,-8.5) 19(0.975,-8.5) 20(1.975,-8.5) 21(2.975,-8.5) 22(3.975,-8.5)
  rect 0.7x2 smd mask+0: 15(-3.025,-8.5) 23(4.975,-8.5) 37(4.975,8.5) 38(3.975,8.5) 39(-3.025,8.5) 40(-4.025,8.5)
  rect 3x3.03 smd mask+0: 41(-0.225,2.17)
  silkscreen extent -8.23,-8.5 7.22,8.5

## Part data
C301 C401 C402 C403 C404 C405 C501 C601 C602 C603 C604 C605 C606 C607 C608 C806 C807 C810 C901 C902 C1001 FB501 FB801 FB802: library part C_0603_1608Metric, "Capacitor SMD 0603 (1608 Metric), square (rectangular) end terminal, IPC_7351 nominal, (Body size source: http://www.tortai-tech.com/upload/download/2011102023233369053.pdf), generated with kicad-footprint-generator"
C609: library part CAPAE660X840N
D601: library part SODFL1608X70N
H101 H102 H103 H104 H105 H106: library part Arduino_1pin, "module 1 pin (ou trou mecanique de percage)"
IC201: library part WLR089U0IRM, "WLR089U0-I/RM-3"
IC202 IC702 IC903: library part SOT95P230X110-3N, "SOT23 (TO-236AB)"
IC301: library part SOIC127P600X175-8N, "8 SO-3"
IC302: library part SOP65P490X110-8N, "UMAX-8"
IC401: library part SOP65P640X110-16N, "Max 21-0066_M (TSSOP)"
IC601: library part SOP65P640X120-8N, "PW0008A"
IC701 IC801 IC902: library part SOP65P640X120-16N, "PW0016A"
IC901: library part NEO-M8T, "NEO-M8T"
IC1001: library part SON65P323X328X55-8N, "8-pin GQFN (3.23 × 3.28 × 0.55 mm) Package Outline, 002-"
J101 J102: library part PinSocket_1x03_P2.54mm_Vertical, "Through hole straight socket strip, 1x03, 2.54mm pitch, single row (from Kicad 4.0.7), script generated"
J301 J302 J501 J505 J511: library part PinSocket_1x02_P2.54mm_Vertical, "Through hole straight socket strip, 1x02, 2.54mm pitch, single row (from Kicad 4.0.7), script generated"
J502: library part PinSocket_1x04_P2.54mm_Vertical, "Through hole straight socket strip, 1x04, 2.54mm pitch, single row (from Kicad 4.0.7), script generated"
J503: library part PinSocket_1x06_P2.54mm_Vertical, "Through hole straight socket strip, 1x06, 2.54mm pitch, single row (from Kicad 4.0.7), script generated"
J504: library part 10119313302TLF, "10119313-302TLF-1"
J506: library part 1040310811, "1040310811"
J507: library part CONUFL001-SMD, "CONUFL001-SMD"
J508: library part SHF-105-01-X-D-SM, "SHF-105-01-L-D-SM-K-TR"
J509 J510: library part BM05BZESSTBTLFSN, "BM05B-ZESS-TBT (LF)(SN)-1"
L601: library part LPS3015, "LPS3015"
L901: library part L_0805_2012Metric, "Inductor SMD 0805 (2012 Metric), square (rectangular) end terminal, IPC_7351 nominal, (Body size source: https://docs.google.com/spreadsheets/d/1BsfQQcO9C6DZCsRaXUlFlo91Tg2WpOkGARC1WS5S8t0/edit?usp=sharing), generated with kicad-footprint-generator"
LED501: library part LEDC2012X75N, "2.0x1.25mm SMD CHIP LED LAMP_2"
LED502 LED503 LED504 LED505: library part LEDC2012X85N, "APT2012"
P101 P105 P106: library part Socket_Strip_Arduino_1x08, "Through hole socket strip"
P102: library part Socket_Strip_Arduino_1x06, "Through hole socket strip"
P103: library part PinHeader_2x03_P2.54mm_Vertical, "Through hole straight pin header, 2x03, 2.54mm pitch, double rows"
P104: library part Socket_Strip_Arduino_1x10, "Through hole socket strip"
PB1 PB2 S601: library part TLSA070JLFS, "TLS A 070J LFS-1"
Q901: library part SOTFL50P160X60-6N, "SC89: 6-LEADS (SOT-563F)_1"
R101 R102 R203 R301 R302 R303 R501 R502 R503 R504 R505 R506 R507 R508 R509 R510 R511 R601 R602 R603 R604 R605 R606 R607 R608 R609 R610 R701 R702 R703 R801 R802 R804 R805 R901 R902 R903 R904 R905 R906 R1001 R1002 R1003 R1101 R1102 R1103: library part R_0805_2012Metric, "Resistor SMD 0805 (2012 Metric), square (rectangular) end terminal, IPC_7351 nominal, (Body size source: https://docs.google.com/spreadsheets/d/1BsfQQcO9C6DZCsRaXUlFlo91Tg2WpOkGARC1WS5S8t0/edit?usp=sharing), generated with kicad-footprint-generator"
S201: library part SOIC127P671X170-16N
U501: library part SOT-23-6, "6-pin SOT-23 package"
U601: library part Texas_DRC0010J_ThermalVias, "Texas DRC0010J, VSON10 3x3mm Body, 0.5mm Pitch,  http://www.ti.com/lit/ds/symlink/tps63000.pdf"
Y1101: library part RV3032C7TAQA, "RV-3032-C7"

## Via types
v1: diameter 0.6, hole 0.4, F.Cu to B.Cu, tented both sides, 123 vias

## Nets (pads, with @x,y where several pads share a name; then routed paths per layer and width w, separated by ;. In a path a pad name is that pad's centre, name@x,y a point inside that pad or via, vN(x,y) a via of type N, cw(c..) or ccw(c..) an arc to the next point about the centre after c; other vN are vias at no path point)
+BATT: C604.1 C609.1 D601.1 IC601.6 J501.2 J505.2 R601.2 R606.1 | length 96.6
  F.Cu w0.4: v1(4.451,9.838) 2.855,9.838 1.029,11.664 1.029,15.244 1.792,16.006 v1@5.768,16.006
  F.Cu w0.5: J501.2@2.794,52.324 J505.2@8.128,52.324 12.393,48.059 C609.1@12.393,45.245 ; v1(4.451,9.838) v1@5.266,9.838 ; D601.1@8.166,44.831 11.292,44.831 11.706,45.245 C609.1@12.393,45.245 ; C609.1@13.081,45.245 C609.1@12.393,45.245
  B.Cu w0.4: v1(4.451,9.838) 4.703,10.089 5.517,10.089 IC601.6@6.841,10.089 ; v1@5.768,16.006 v1(5.846,16.006) 6.633,16.006
  B.Cu w0.5: J501.2@2.794,52.324 1.259,50.789 1.259,23.428 6.96,17.728 C604.1@6.96,17.526 6.633,17.2 6.633,16.006 R606.1@6.634,14.351 ; v1@4.83,16.006 v1(4.957,16.006) 5.211,16.006 v1@5.768,16.006 ; v1(5.207,9.779) 5.517,10.089 5.517,9.962 ; J505.2@8.128,52.324 10.542,49.91 R601.2@10.542,35.56
AD1: IC201.14 S201.1 | length 9.7
  F.Cu w0.25: IC201.14@83.956,29.425 85.031,29.425 85.031,33.739 87.249,35.957 S201.1@87.249,37.082
AD2: IC201.28 S201.2 | length 19.9
  F.Cu w0.25: S201.2@88.519,37.082 88.519,35.957 88.634,35.957 v1(88.834,35.756) ; v1(89.578,19.701) 90.028,19.25 90.376,19.25 IC201.28@90.376,18.175
  B.Cu w0.25: v1(88.834,35.756) 88.834,20.445 v1(89.578,19.701)
AD3: IC201.13 S201.3 | length 7
  F.Cu w0.25: IC201.13@86.376,31.675 86.376,32.75 88.69,35.064 89.028,35.064 89.789,35.825 89.789,35.957 S201.3@89.789,37.082
AD4: IC201.11 S201.4 | length 6.5
  F.Cu w0.25: IC201.11@88.376,31.675 88.376,33.274 91.059,35.957 S201.4@91.059,37.082
AD5: IC201.10 S201.5 | length 6.7
  F.Cu w0.25: IC201.10@89.376,31.675 89.376,33.114 92.219,35.957 92.329,35.957 S201.5@92.329,37.082
AD6: IC201.7 S201.6 | length 5.9
  F.Cu w0.25: IC201.7@92.376,31.675 92.376,32.75 92.376,34.345 93.599,35.568 93.599,35.957 S201.6@93.599,37.082
AD7: IC201.6 S201.7 | length 6
  F.Cu w0.25: IC201.6@93.376,31.675 93.376,32.75 93.376,34.464 94.869,35.957 S201.7@94.869,37.082
AD8: IC201.5 S201.8 | length 6.1
  F.Cu w0.25: IC201.5@94.376,31.675 94.376,34.194 96.139,35.957 S201.8@96.139,37.082
ANT_ON: IC901.14 Q901.5 | length 29.4
  F.Cu w0.25: v1(22.548,31.124) 22.548,34.783 v1(22.825,35.059)
  B.Cu w0.25: Q901.5@22.025,35.56 22.585,35.56 22.585,35.298 v1(22.825,35.059) ; v1(22.548,31.124) 29.808,23.865 35.553,23.865 40.444,18.974 IC901.14@40.444,17.749
C1+: C404.1 IC401.2 | length 2.9
  B.Cu w0.25: IC401.2@79.646,47.091 80.709,47.091 81.243,47.091 81.955,47.803 C404.1@82.296,47.803
C1-: C404.2 IC401.4 | length 2.8
  B.Cu w0.25: IC401.4@79.646,45.791 81.859,45.791 C404.2@82.296,46.228
C2+: C403.1 IC401.5 | length 2.9
  B.Cu w0.25: IC401.5@79.646,45.141 81.605,45.141 C403.1@82.296,44.45
C2-: C403.2 IC401.6 | length 3.3
  B.Cu w0.25: IC401.6@79.646,44.491 80.709,44.491 80.709,44.462 C403.2@82.296,42.875
GND: C301.2 C401.2 C402.2 C405.2 C501.2 C601.2 C602.2 C603.2 C604.2 C605.2 C606.2 C607.2 C609.2 C806.2 C807.2 C810.2 C901.2 C902.2 C1001.2 FB801.2 IC201.1 IC201.2 IC201.12 IC201.15 IC201.23 IC201.24 IC201.35 IC201.36 IC201.37 IC201.38 IC201.39 IC201.40 IC201.41 IC301.5 IC302.5 IC401.1 IC401.14 IC601.2 IC601.5 IC701.10 IC801.10 IC901.2 IC901.7 IC901.10 IC901.12 IC901.13 IC901.24 IC902.10 IC1001.4 J302.1 J501.1 J502.4 J503.6 J504.5 J505.1 J506.6 J507.2 J507.3 J508.3 J508.5 J508.9 J509.5 J510.5 J511.1 J802.9 P101.6 P101.7 PB1.2 PB2.2 Q901.1 R503.2 R602.2 R603.2 R604.2 R606.2 R609.2 R610.2 R801.2 R804.2 R805.2 R1101.2 R1102.1 S201.9 S201.10 S201.11 S201.12 S201.13 S201.14 S201.15 S201.16 S601.2 U501.2 U601.3 U601.7 U601.9 U601.11 Y1101.5 | length 656.7
  F.Cu w0.24: U601.7@1.14,36.06 U601.11@1.89,36.06 ; U601.11@3.19,35.56 U601.3@3.94,35.56
  F.Cu w0.25: U601.9@1.14,35.06 1.765,35.06 U601.11@1.865,35.16 ; U601.11@1.965,35.16 U601.11@1.965,35.56 ; 19.659,36.351 v1(22.86,36.351) ; 52.149,21.542 53.68,21.542 53.806,21.667 J802.9@54.531,21.667
  F.Cu w0.5: U601.11@1.865,35.16 1.965,35.16 1.99,35.16 U601.11@2.54,34.61 ; U601.11@1.89,36.06 U601.11@1.965,35.985 ; R610.2@1.905,44.831 R610.2@2.001,44.831 ; v1(2.54,24.257) 2.54,23.747 v1(2.54,23.322) 3.223,22.639 R609.2@3.223,22.098 ; v1(2.794,38.862) 2.921,38.735 2.921,36.891 U601.11@2.54,36.51 2.49,36.51 U601.11@1.965,35.985 ; J501.1@2.794,49.784 J501.1@2.794,49.134 ; U601.11@3.19,35.56 U601.11@3.115,35.56 U601.11@2.54,35.56 U601.11@1.965,35.56 U601.11@1.965,35.985 ; C606.2@7.645,38.481 7.645,40.15 8.271,40.776 ; J505.1@8.128,49.784 6.828,49.784 6.178,49.134 J501.1@2.794,49.134 ; C607.2@8.153,35.56 8.229,35.56 10.251,33.539 ; J504.5@8.255,23.901 10.251,25.896 10.251,33.539 ; v1(10.542,15.859) 12.65,13.75 v1(12.65,13.013) 13.171,13.013 v1(13.477,13.32) v1(20.748,20.59) 21.04,20.59 34.326,7.304 37.895,7.304 ; C603.2@19.355,1.27 19.567,1.059 39.159,1.059 P101.6@40.64,2.54 ; v1(19.582,33.871) 18.381,35.073 ; 19.659,36.351 18.381,35.073 ; v1@29.21,43.942 v1(29.146,44.005) 28.829,44.323 28.761,44.323 28.634,44.45 J502.4@27.432,44.45 26.027,43.045 16.968,43.045 14.456,40.533 14.456,39.845 C609.2@13.081,39.845 11.706,39.845 10.774,40.776 8.271,40.776 ; v1@37.086,10.031 v1(37.895,10.031) ; v1(41.529,19.812) 42.513,18.828 v1(42.513,17.066) 43.722,15.858 ; P101.7@43.18,2.54 41.954,2.54 P101.6@40.64,2.54 ; 52.149,21.542 49.948,21.542 49.44,21.034 49.44,18.605 ; v1(53.43,17.093) v1@53.43,17.167 ; PB1.2@53.784,11.938 56.332,11.938 v1(58.251,13.858) v1(59.451,13.858) 59.917,13.858 61.923,15.864 ; PB2.2@57.595,17.907 56.445,17.907 55.704,17.167 v1(55.521,17.167) v1@53.43,17.167 ; v1(61.872,16.941) 61.923,16.89 61.923,15.864 ; J510.5@70.46,36.243 72.11,36.243 72.961,35.393 79.927,35.393 80.846,34.474 ; v1(72.032,45.973) 72.864,46.805 v1(75.243,46.805) 76.916,48.479 v1(79.938,48.479) ; S601.2@75.756,5.842 76.906,5.842 76.906,7.184 ; v1(77.873,18.937) v1@77.873,19.091 ; v1(78.261,26.985) 77.904,27.342 77.904,29.158 80.298,31.552 v1(80.846,31.552) ; v1(80.596,7.184) 76.906,7.184 ; IC201.24@86.376,18.175 86.376,19.625 ; S201.16@87.249,43.182 S201.16@87.249,42.87 ; IC201.12@87.376,31.675 87.376,30.525 87.376,28.425 ; S201.15@88.519,43.182 88.519,43.143 S201.15@88.519,42.87 ; S201.14@89.789,43.182 S201.14@89.789,42.557 ; S201.13@91.059,43.182 S201.13@91.059,42.557 ; S201.12@92.329,43.182 S201.12@92.329,42.557 ; J508.3@93.218,8.127 93.218,8.18 93.218,9.314 93.879,9.975 94.488,9.975 ; S201.11@93.599,43.182 S201.11@93.599,42.557 ; J508.5@94.488,8.127 94.488,9.975 ; S201.10@94.869,43.182 S201.10@94.869,42.557 ; S201.9@96.139,43.182 96.139,41.932 95.494,41.932 S201.10@94.869,42.557 ; J508.9@97.028,8.127 97.028,9.975 ; IC201.35@97.376,18.175 97.376,19.625 ; IC201.2@97.376,31.675 97.376,30.225 ; IC201.1@98.376,31.675 IC201.1@98.376,30.95 ; IC201.37@100.956,20.425 IC201.37@100.231,20.425 ; IC201.38@100.956,21.425 100.231,21.425 IC201.37@100.231,20.425 ; IC201.39@100.956,28.425 100.231,28.425 IC201.40@100.231,29.425 ; IC201.40@100.956,29.425 IC201.40@100.231,29.425 ; R610.2@2.001,44.831 3.343,43.489 5.558,43.489 C605.2@7.645,41.402 8.271,40.776 ; R610.2@2.001,44.831 2.001,47.691 2.794,48.484 J501.1@2.794,49.134 ; 10.251,33.539 11.785,35.073 18.381,35.073 ; 37.895,7.304 37.895,5.285 P101.6@40.64,2.54 ; 37.895,7.304 v1(37.895,10.031) ; v1(37.895,10.031) 43.722,15.858 ; 43.722,15.858 46.468,18.605 49.44,18.605 ; 49.44,18.605 50.878,17.167 v1@53.43,17.167 ; 61.923,15.864 68.18,15.864 ; 68.18,15.864 69.566,14.478 J503.6@70.866,14.478 72.166,14.478 76.906,9.738 76.906,7.184 ; 68.18,15.864 68.18,17.929 70.46,20.209 J509.5@70.46,20.622 71.285,20.622 72.11,20.622 76.342,20.622 v1@77.873,19.091 ; v1@77.873,19.091 81.904,19.091 82.506,19.692 82.506,20.425 IC201.23@83.956,20.425 85.406,20.425 86.206,19.625 86.376,19.625 ; v1(80.846,31.552) 82.506,29.892 82.506,28.425 IC201.15@83.956,28.425 84.381,28.425 85.331,28.425 87.376,28.425 ; v1(80.846,31.552) 80.846,34.474 ; 80.846,34.474 82.282,35.911 82.677,35.911 J302.1@82.677,37.211 82.677,38.511 83.203,38.511 87.249,42.557 S201.16@87.249,42.87 ; 86.376,19.625 90.425,23.675 94.626,23.675 ; S201.16@87.249,42.87 S201.15@88.519,42.87 ; 87.376,28.425 93.776,28.425 94.626,27.575 ; S201.15@88.519,42.87 88.519,42.613 89.2,41.932 89.789,41.932 S201.14@89.789,42.557 ; S201.14@89.789,42.557 S201.13@91.059,42.557 ; S201.13@91.059,42.557 S201.12@92.329,42.557 ; S201.12@92.329,42.557 S201.11@93.599,42.557 ; S201.11@93.599,42.557 S201.10@94.869,42.557 ; 94.488,9.975 97.028,9.975 ; 94.626,23.675 IC201.41@94.626,25.625 94.626,27.575 ; 94.626,23.675 97.376,20.925 97.376,19.625 ; 94.626,27.575 97.275,30.225 97.376,30.225 ; 97.028,9.975 97.258,9.975 98.376,11.094 IC201.36@98.376,18.175 98.376,18.9 98.376,19.625 ; 97.376,19.625 98.376,19.625 ; 97.376,30.225 97.923,30.225 98.376,30.678 IC201.1@98.376,30.95 ; 98.376,19.625 99.431,19.625 IC201.37@100.231,20.425 ; IC201.1@98.376,30.95 98.376,30.225 98.706,30.225 99.506,29.425 IC201.40@100.231,29.425
  B.Cu w0.25: v1(22.86,36.351) 23.135,36.076 23.135,36.06 Q901.1@23.695,36.06
  B.Cu w0.3: v1(20.748,20.59) 20.963,20.375 22.199,20.375 IC902.10@22.199,19.287 ; 32.719,10.031 v1(37.082,10.031) v1(37.895,10.031) 38.061,9.865 IC1001.4@38.836,9.865
  B.Cu w0.4: IC601.5@6.841,9.439 7.979,9.439 8.064,9.354 11.205,9.354 ; R604.2@11.206,7.112 11.205,9.354 ; IC601.2@12.717,10.739 12.298,10.739 11.579,10.739 11.205,10.365 11.205,9.354 ; C901.2@27.716,14.524 27.797,14.443 32.209,10.031 32.719,10.031 ; IC801.10@60.562,16.917 61.7,16.917 61.723,16.941 v1(61.872,16.941) ; IC401.14@73.77,46.441 74.908,46.441 74.908,46.471 v1(75.243,46.805) ; IC701.10@76.809,17.382 76.809,18.52 77.457,18.52 v1(77.873,18.937) ; IC401.1@79.646,47.741 IC401.1@79.847,47.942 ; IC302.5@79.83,26.33 80.375,26.33 79.884,25.838 C301.2@79.884,24.384 ; 80.868,47.821 81.717,48.671 82.779,48.671 82.987,48.462 83.024,48.462 83.272,48.215 ; 83.384,48.103 83.396,48.091
  B.Cu w0.5: U601.11@2.54,34.61 v1(2.54,23.322) 2.54,23.312 6.809,19.043 7.017,19.043 C604.2@8.534,17.526 C601.2@10.542,17.526 ; U601.11@2.54,36.51 2.794,36.764 J501.1@2.794,49.784 ; U601.11@3.115,35.56 3.435,35.88 U501.2@6.139,35.88 ; J504.5@8.255,23.901 11.313,20.843 ; R606.2@8.508,14.351 R602.2@10.542,14.351 v1(10.542,15.859) ; C602.2@10.542,33.528 R603.2@10.542,31.496 12.367,29.67 R503.2@12.367,29.21 13.259,28.319 C501.2@13.259,21.844 ; v1(11.176,15.24) 10.857,15.559 10.841,15.559 v1(10.542,15.859) ; 11.579,10.739 11.529,10.789 11.529,11.892 v1(12.65,13.013) 13.075,13.013 v1@13.396,13.335 ; C501.2@13.335,21.844 C501.2@13.259,21.844 ; v1(19.582,33.871) 19.583,33.87 C902.2@19.583,32.512 27.231,32.512 28.644,31.099 ; J502.4@27.432,44.45 28.732,44.45 30.039,43.143 40.476,43.143 J511.1@41.783,44.45 43.083,44.45 43.386,44.148 R1101.2@46.482,44.148 R1102.1@50.292,44.148 ; IC901.24@27.544,17.749 27.544,14.696 C901.2@27.635,14.605 C901.2@27.716,14.524 ; IC901.2@28.644,29.749 28.644,31.099 ; IC901.7@34.144,29.749 34.144,31.099 33.246,31.998 29.542,31.998 28.644,31.099 ; IC901.10@39.344,29.749 39.344,29.249 39.344,28.399 41.544,28.399 ; v1(42.513,17.066) 42.227,17.066 IC901.13@41.544,17.749 41.544,28.399 ; P101.7@43.18,2.54 48.895,8.255 C1001.2@49.047,8.255 ; J507.3@46.433,32.512 44.458,32.512 J507.2@43.483,32.512 42.07,31.099 41.544,31.099 IC901.12@41.544,29.749 41.544,28.399 ; R804.2@52.453,13.548 52.453,15.928 C806.2@52.104,16.278 52.918,17.092 v1(53.43,17.093) 53.542,17.204 v1@55.547,17.204 ; 58.709,44.37 55,40.661 55,29.226 FB801.2@55.397,28.829 C807.2@55.397,26.797 56.197,25.997 56.197,20.843 R801.2@55.547,20.193 v1@55.547,17.204 ; v1@59.421,13.858 v1(58.251,13.858) 58.251,14.14 C810.2@56.113,16.278 56.113,16.638 v1@55.547,17.204 ; R805.2@67.056,11.255 69.566,13.764 69.566,14.478 v1(69.596,14.478) J503.6@70.866,14.478 ; C405.2@70.358,45.949 72.007,45.949 v1(72.032,45.973) ; v1(78.261,26.985) 78.261,26.896 79.318,25.838 79.884,25.838 ; IC301.5@79.457,31.242 80.67,31.242 80.67,31.376 v1(80.846,31.552) ; v1@79.557,7.184 v1(79.574,7.184) v1(80.596,7.184) 82.913,4.867 82.913,3.282 J506.6@82.913,2.282 ; IC401.1@79.847,47.942 IC401.1@79.938,47.942 ; v1(79.938,48.479) IC401.1@79.938,47.942 ; 80.868,47.821 80.746,47.942 IC401.1@79.938,47.942 ; v1(81.788,35.56) 82.376,35.56 82.677,35.861 J302.1@82.677,37.211 82.677,38.511 v1(86.281,42.116) 86.385,42.22 C402.2@86.385,43.688 86.086,43.987 86.086,46.945 C401.2@86.385,47.244 85.395,48.235 83.54,48.235 83.396,48.091 ; 83.272,48.215 83.384,48.103 ; v1(10.542,15.859) C601.2@10.542,17.526 ; C601.2@10.542,17.526 10.542,20.071 11.313,20.843 ; 11.313,20.843 12.257,20.843 C501.2@13.259,21.844
GPS_ANTENNA: IC901.11 J507.1 L901.1 | length 7.4
  B.Cu w0.25: IC901.11@40.444,29.749 40.444,31.554 L901.1@41.783,32.893 41.784,32.967 42.854,34.037 J507.1@44.958,34.037
GPS_EXTINT: IC901.4
GPS_MISO: IC901.20 IC902.13 | length 15.8
  B.Cu w0.25: IC902.13@20.249,19.287 20.249,18.224 21.15,17.324 23.762,17.324 26.363,19.925 30.993,19.925 31.944,18.974 IC901.20@31.944,17.749
GPS_MOSI: IC901.21 IC902.14 | length 15.4
  B.Cu w0.25: IC902.14@19.599,19.287 19.599,18.224 20.95,16.873 24.025,16.873 26.613,19.461 30.358,19.461 30.844,18.974 IC901.21@30.844,17.749
GPS_nCS: IC901.18 IC902.11 | length 16.7
  B.Cu w0.25: IC902.11@21.549,19.287 21.549,18.224 23.23,18.224 25.831,20.826 32.293,20.826 34.144,18.974 IC901.18@34.144,17.749
GPS_SCK: IC901.19 IC902.12 | length 16.3
  B.Cu w0.25: IC902.12@20.899,19.287 20.899,18.224 21.349,17.774 23.496,17.774 26.097,20.375 31.643,20.375 33.044,18.974 IC901.19@33.044,17.749
GPS_TIMEPULSE: IC901.3 P106.2 R1102.2 Y1101.4 | length 65.7
  F.Cu w0.25: v1(30.578,31.243) 33.367,34.032 v1(55.75,34.032) ; v1(54.146,43.952) 59.551,43.952 ; v1(59.551,43.605) 59.551,43.952 ; P106.2@71.12,50.8 69.931,50.8 69.931,50.28 63.603,43.952 59.551,43.952
  B.Cu w0.25: IC901.3@29.744,29.749 29.744,30.974 30.309,30.974 v1(30.578,31.243) ; R1102.2@50.292,46.022 52.076,46.022 v1(54.146,43.952) ; v1(55.75,34.032) 55.75,39.805 v1(59.551,43.605) 59.909,43.963 59.909,44.37
GPS_VDD: C901.1 IC901.22 IC901.23 IC902.15 IC903.3 | length 43.1
  F.Cu w0.25: v1(26.614,18.578) 33.703,25.667 v1(35.024,25.667)
  B.Cu w0.25: IC902.15@18.949,19.287 18.949,18.224 20.75,16.423 24.458,16.423 v1(26.614,18.578) 27.009,18.974 28.644,18.974 IC901.23@28.644,18.362 ; IC901.23@28.644,17.749 IC901.23@28.644,18.362 ; C901.1@29.209,14.605 29.744,15.139 IC901.22@29.744,17.749 29.744,18.974 29.18,18.974 28.644,18.438 IC901.23@28.644,18.362 ; IC903.3@34.628,35.052 35.782,35.052 37.105,33.73 37.105,32.313 35.024,30.232 v1(35.024,25.667)